# EAGLE board perfusion_esquematico_v1 (EAGLE 9.4.2)
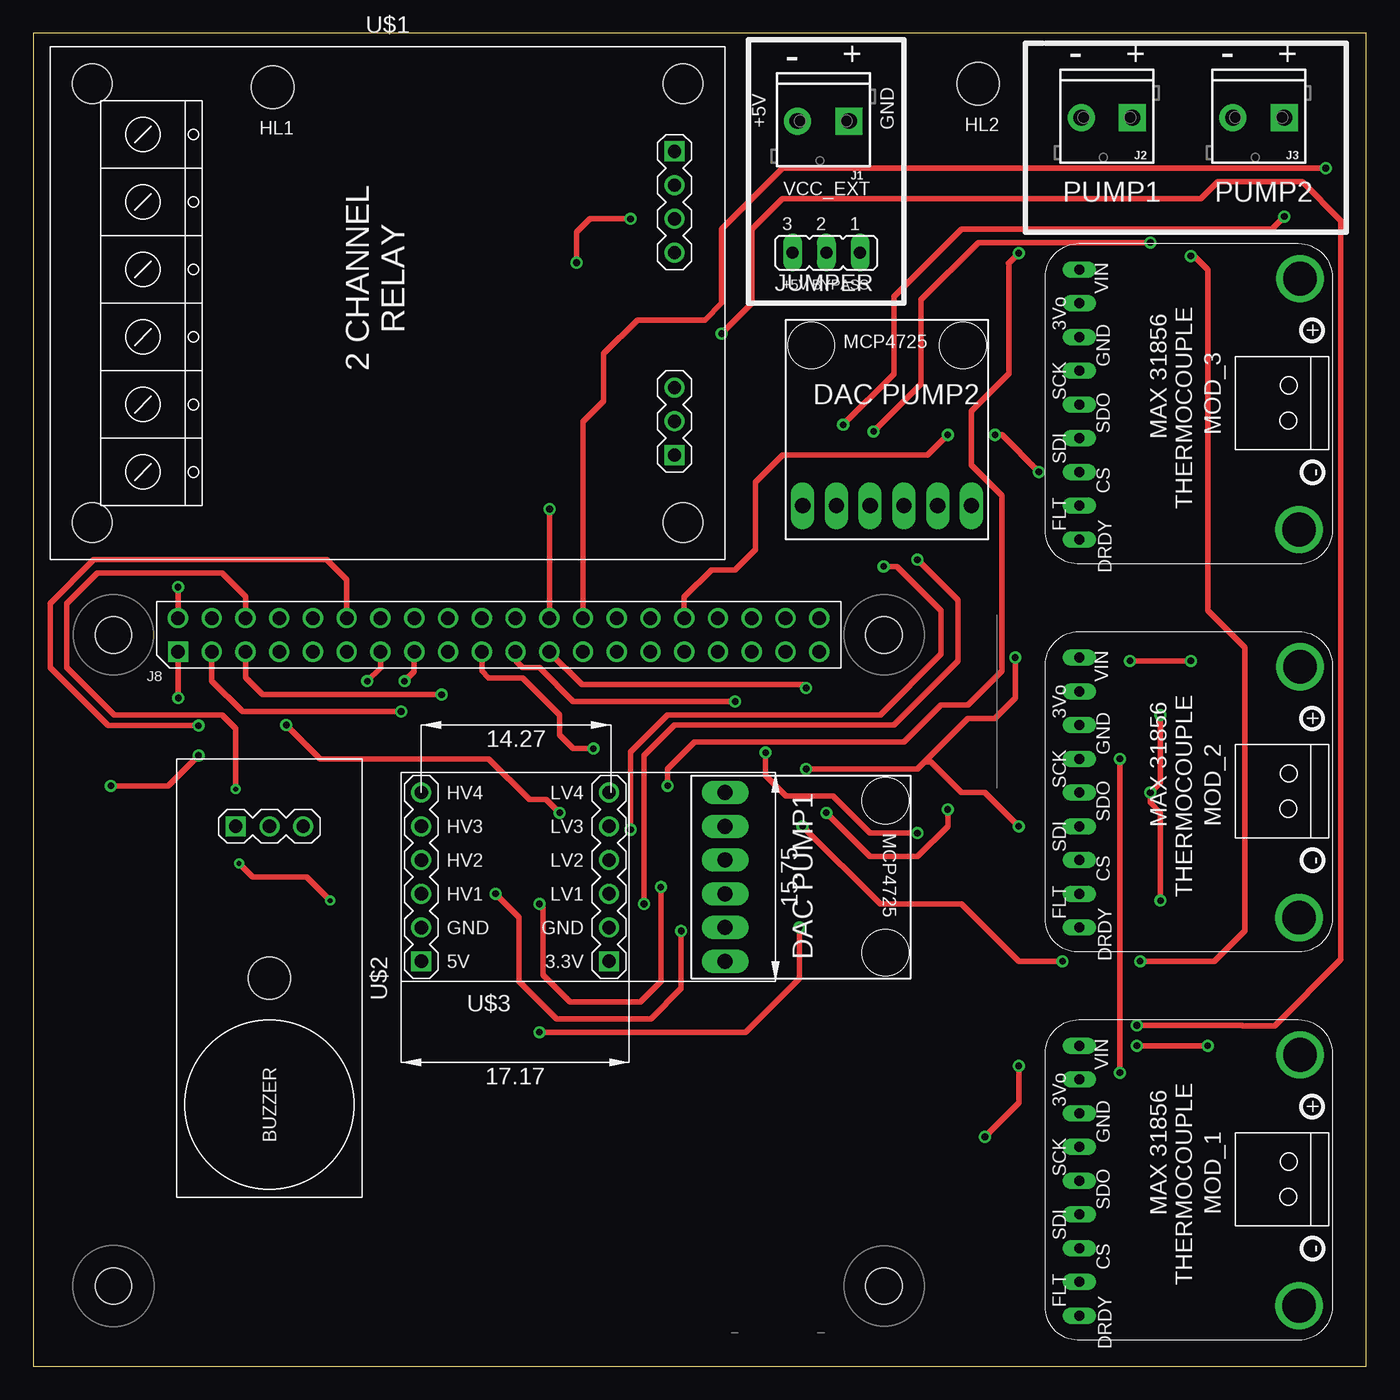
[diagram p0: board, top side]
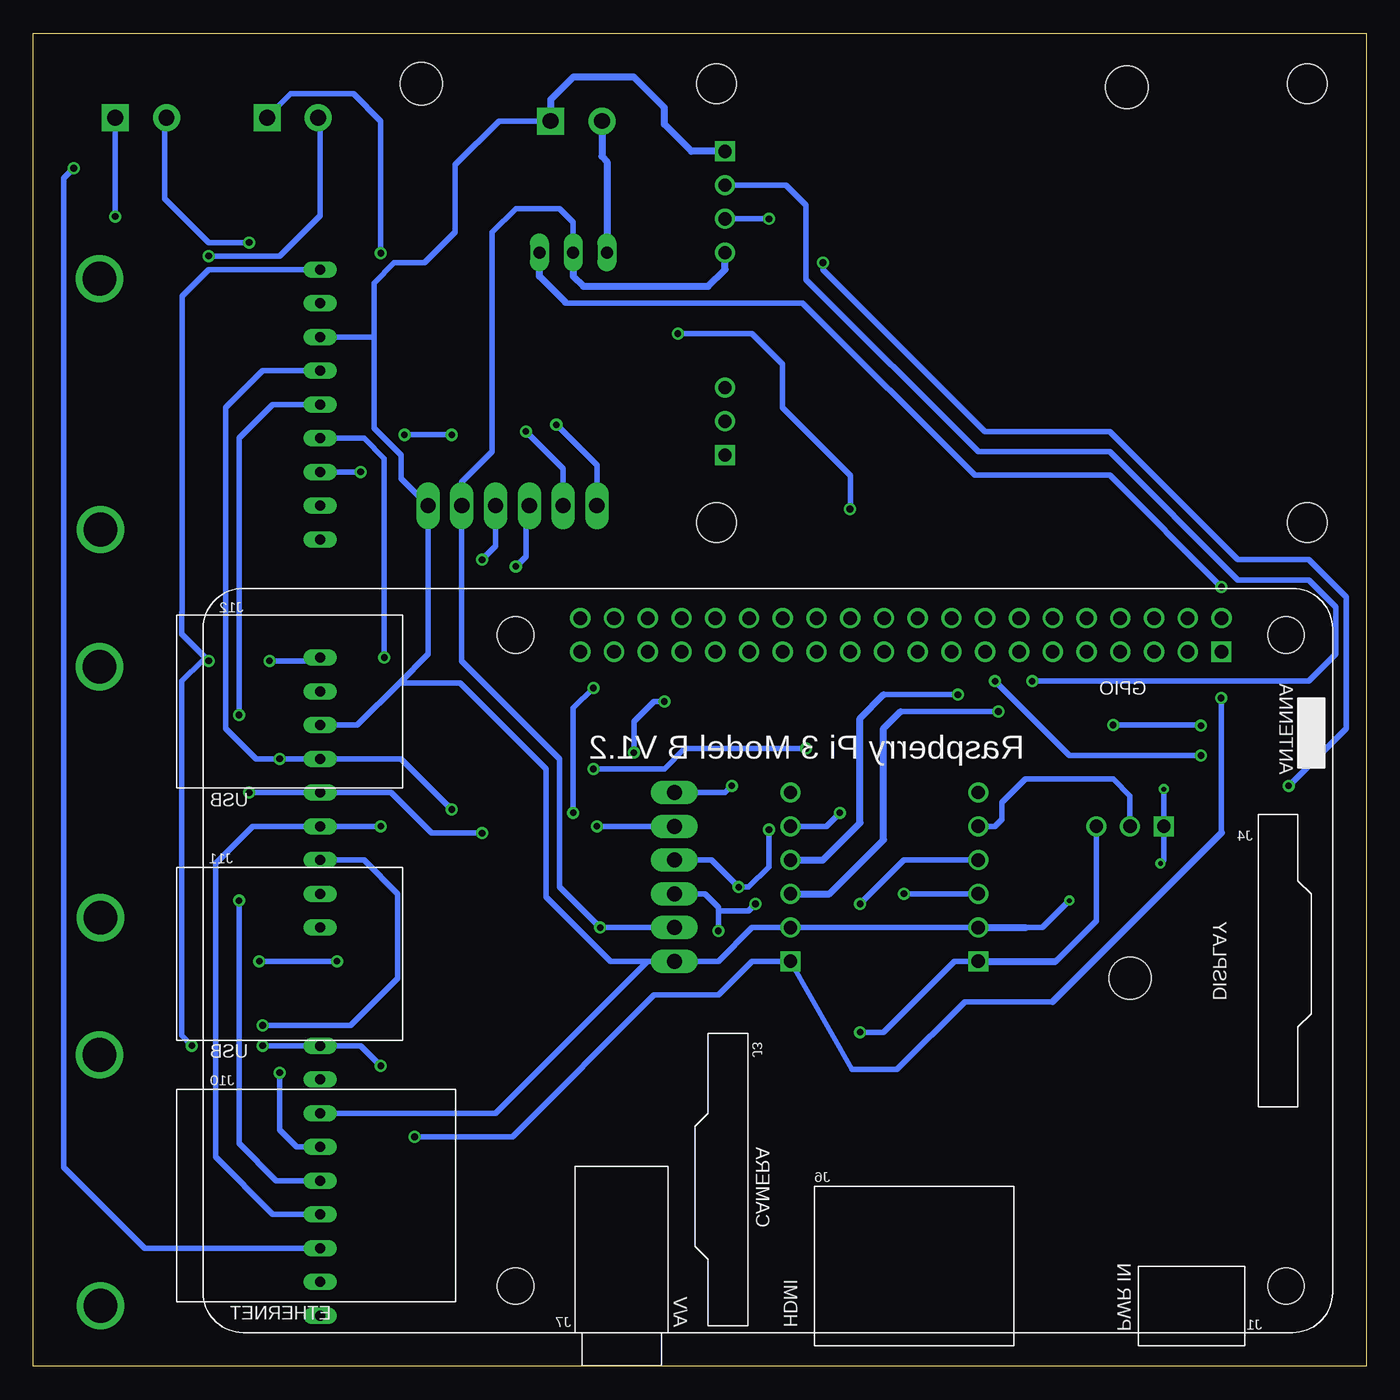
[diagram p1: board, bottom side, seen from below]

Size 100.33 x 100.33 mm. Coordinates in mm from the lower left corner, seen from the top.
Outline: 0,0 100.33,0 100.33,100.33 0,100.33 0,0
Copper layers (1*16): Top 0.035mm / dielectric 1.5mm / Bottom 0.035mm
Design rules "default": minimum track width 6mil, minimum drill 0.35mm, track to track 6mil, track to pad 6mil, pad to pad 6mil, via to via 6mil, smd to smd 6mil, copper to edge 40mil, drill to drill 6mil, minimum pad ring 10mil, minimum via ring 8mil, stop-mask expansion 4mil, vias tented up to drill 0mil, thermal gap 10mil
Holes 3.2 mm at 71.12,96.52 18.03,96.27

## Footprints (pad centres in the part's own frame; a part is rotated, then mirrored left to right if it is on the bottom)
SCREWTERMINAL-3.5MM-2_LOCK = drill 1.2 pad 2.032 square: 1 -0.178,0 | drill 1.2 pad 2.032: 2 3.678,0
JP2 = drill 0.914 long: 1 -2.54,0; 2 0,0; 3 2.54,0
RPI3 = drill 1.016 square: P$1 8.37,51.23 | drill 1.016: P$2 8.357,53.772; P$3 10.897,51.232; P$4 10.897,53.772; P$5 13.437,51.232; P$6 13.437,53.772; P$7 15.977,51.232; P$8 15.977,53.772; P$9 18.517,51.232; P$10 18.517,53.772; P$11 21.057,51.232; P$12 21.057,53.772; P$13 23.597,51.232; P$14 23.597,53.772; P$15 26.137,51.232; P$16 26.137,53.772; P$17 28.677,51.232; P$18 28.677,53.772; P$19 31.217,51.232; P$20 31.217,53.772; P$21 33.757,51.232; P$22 33.757,53.772; P$23 36.297,51.232; P$24 36.297,53.772; P$25 38.837,51.232; P$26 38.837,53.772; P$27 41.377,51.232; P$28 41.377,53.772; P$29 43.917,51.232; P$30 43.917,53.772; P$31 46.457,51.232; P$32 46.457,53.772; P$33 48.997,51.232; P$34 48.997,53.772; P$35 51.537,51.232; P$36 51.537,53.772; P$37 54.077,51.232; P$38 54.077,53.772; P$39 56.617,51.232; P$40 56.617,53.772 | hole 2.75: 3.5,3.5; 61.5,3.5; 3.5,52.5; 61.5,52.5
RELAY-2-SRD = drill 1 square: J1.1 21.59,11.43; J2.1 21.59,-11.43 | drill 1: J1.2 21.59,8.89; J1.3 21.59,6.35; J1.4 21.59,3.81; J2.2 21.59,-8.89; J2.3 21.59,-6.35 | hole 3: -22.225,16.51; 22.225,16.51; 22.225,-16.51; -22.225,-16.51
SOUND-BUZZER = drill 1 square: 1 -11.43,-2.54 | drill 1: 2 -11.43,0; 3 -11.43,2.54 | hole 3.2: 0,0
LEVEL-SHIFTER-4CH = drill 1 square: J1.1 -9.042,6.35; J2.1 5.08,6.35 | drill 1: J1.2 -9.042,3.81; J1.3 -9.042,1.27; J1.4 -9.042,-1.27; J1.5 -9.042,-3.81; J1.6 -9.042,-6.35; J2.2 5.08,3.81; J2.3 5.08,1.27; J2.4 5.08,-1.27; J2.5 5.08,-3.81; J2.6 5.08,-6.35
MAX31856 = drill 0.75 long: PINES1 2.54,2.54; PINES2 5.08,2.54; PINES3 7.62,2.54; PINES4 10.16,2.54; PINES5 12.7,2.54; PINES6 15.24,2.54; PINES7 17.78,2.54; PINES8 20.32,2.54; PINES9 22.86,2.54 | drill 2.54 pad 3.556: PINES10 3.232,19.135; PINES11 22.116,19.077
LIB1 = drill 1.143 pad 1.778 long: GND 1.27,1.27; GND2 1.27,11.43; OUT 1.27,13.97; SCL 1.27,8.89; SDA 1.27,6.35; VCC 1.27,3.81

## Placement (x,y rotation side)
J1  [SCREWTERMINAL-3.5MM-2_LOCK]  61.21,93.73 180 top
J2  [SCREWTERMINAL-3.5MM-2_LOCK]  82.55,93.98 180 top
J3  [SCREWTERMINAL-3.5MM-2_LOCK]  93.98,93.98 180 top
JUMPER  [JP2]  59.69,83.82 180 top
PCB1  RPI3  [RPI3]  2.54,2.54 0 top
U$1  RELAY-2-SRD  [RELAY-2-SRD]  26.67,80.01 0 top
U$2  SOUND-BUZZER  [SOUND-BUZZER]  17.78,29.21 270 top
U$3  LEVEL-SHIFTER-4CH  [LEVEL-SHIFTER-4CH]  34.29,36.83 180 top
U$4  MAX31856  [MAX31856]  76.2,55.88 270 top
U$5  MAX31856  [MAX31856]  76.2,26.67 270 top
U$6  MAX31856  [MAX31856]  76.2,85.09 270 top
U$7  LIB1MCP4725_ABF  [LIB1]  71.88,63.5 90 top
U$8  LIB1MCP4725_ABF  [LIB1]  50.8,29.21 0 top

## Library data of the parts
J1-J3 = SparkFun-Connectors; PROD_ID: CONN-08399
JUMPER = jumper
PCB1 = e14_Rpi3_RevA
U$1-U$3 = diy-modules
U$4-U$6 = max31856_libreria
U$7 U$8 = mcp4725_alberto

## Nets
BUZZER_IN: PCB1.P$12 U$3.J1.5
BUZZER_OUT_5V: U$2.2 U$3.J2.5
GND.2: U$1.J2.3
I2C_SCL: PCB1.P$5 U$3.J1.4
I2C_SCL_5V: U$3.J2.4 U$7.SCL U$8.SCL
I2C_SDA: PCB1.P$3 U$3.J1.3
I2C_SDA_5V: U$3.J2.3 U$7.SDA U$8.SDA
MCP_1_GND: J2.2 U$8.GND2
MCP_1_VSS: J2.1 U$8.OUT
MCP_2_GND: J3.2 U$7.GND2
MCP_2_VSS: J3.1 U$7.OUT
RELAY_IN1: PCB1.P$15 U$1.J1.3
RELAY_IN2: PCB1.P$13 U$1.J1.2
RPI3_+3V: PCB1.P$1 U$3.J1.1 U$4.PINES1 U$5.PINES1 U$6.PINES1
RPI3_+5V: JUMPER.2 U$1.J1.4 U$2.3 U$3.J2.1 U$7.VCC U$8.VCC
RPI3_+5V_IN: JUMPER.1 PCB1.P$2
RPI3_GND: J1.1 PCB1.P$6 U$1.J1.1 U$2.1 U$3.J1.2 U$3.J2.2 U$4.PINES3 U$5.PINES3 U$6.PINES3 U$7.GND U$8.GND
SPI0_CLK: PCB1.P$23 U$4.PINES4 U$5.PINES4 U$6.PINES4
SPI0_CS0: PCB1.P$24 U$4.PINES7
SPI0_CS1: PCB1.P$26 U$5.PINES7
SPI0_MISO: PCB1.P$21 U$4.PINES5 U$5.PINES5 U$6.PINES5
SPI0_MOSI: PCB1.P$19 U$4.PINES6 U$5.PINES6 U$6.PINES6
SUPPLY_+5V: J1.2 JUMPER.3
THERMO_CS3: PCB1.P$32 U$6.PINES7
VCC.2: U$1.J2.2

## Tracks (layer width: path | path; a pad name or v marks a point on that pad's centre or on a via)
BUZZER_IN  (via drill 0.5)
  Top 0.406: v39.62,41.66 38.61,42.67 37.34,42.67 34.29,45.72 21.59,45.72 v19.05,48.26 | v12.45,48.21 5.63,48.21 1.27,52.58 1.27,57.4 4.57,60.71 22.1,60.71 23.6,59.21 PCB1.P$12
  Bottom 0.406: U$3.J1.5 40.64,40.64 v39.62,41.66 | v19.05,48.26 12.45,48.26 v12.45,48.21
BUZZER_OUT_5V
  Bottom 0.406: U$2.2 17.78,42.93 19.05,44.2 25.65,44.2 27.43,42.42 27.43,41.15 27.94,40.64 U$3.J2.5
I2C_SCL  (via drill 0.5)
  Top 0.406: v30.73,50.55 17.27,50.55 15.98,51.84 PCB1.P$5
  Bottom 0.406: 36.32,50.55 v30.73,50.55
  Bottom 0.508: U$3.J1.4 40.89,38.1 38.1,40.89 38.1,48.77 36.32,50.55
I2C_SCL_5V  (via drill 0.5)
  Top 0.406: v38.1,34.8 38.35,34.54 38.35,29.46 40.39,27.43 45.72,27.43 47.24,28.96 v47.24,36.07 | v64.01,60.2 65.02,60.2 68.33,56.9 68.33,53.59 63.75,49.02 47.75,49.02 44.96,46.23 v44.96,40.39
  Bottom 0.406: U$3.J2.4 34.8,38.1 v38.1,34.8 | U$8.SCL 49.28,38.1 v47.24,36.07 46.48,36.07 44.96,37.59 v44.96,40.39 | U$7.SCL 63.25,64.52 63.25,60.96 v64.01,60.2
I2C_SDA  (via drill 0.5)
  Top 0.406: v27.69,49.28 15.75,49.28 13.44,51.59 PCB1.P$3
  Bottom 0.406: 35.05,49.28 v27.69,49.28
  Bottom 0.508: U$3.J1.3 40.39,35.56 36.32,39.62 36.32,48.01 35.05,49.28
I2C_SDA_5V  (via drill 0.5)
  Top 0.406: v34.8,35.56 36.58,33.78 36.58,28.96 39.37,26.16 46.48,26.16 48.77,28.45 v48.77,32.77 | v66.55,60.71 69.6,57.66 69.6,53.09 64.77,48.26 48.26,48.26 45.97,45.97 v45.97,34.8
  Bottom 0.406: v34.8,35.56 U$3.J2.3 | v48.77,32.77 48.77,34.29 | 48.77,34.29 48.77,34.54 49.78,35.56 U$8.SDA | U$7.SDA 65.53,61.72 v66.55,60.71 | v45.97,34.8 46.48,34.29 48.77,34.29
MCP_1_GND  (via drill 0.5)
  Top 0.406: v57.91,40.64 63.75,34.8 69.85,34.8 74.17,30.48 v77.47,30.48 | v83.31,30.48 88.9,30.48 91.19,32.77 91.19,54.1 88.39,56.9 88.39,82.55 87.38,83.57 v87.12,83.57
  Bottom 0.406: U$8.GND2 v57.91,40.64 | v77.47,30.48 v83.31,30.48 | v87.12,83.57 81.79,83.57 78.74,86.61 78.74,93.85 J2.2
MCP_1_VSS  (via drill 0.5)
  Top 0.406: v74.17,83.77 73.43,83.03 | 73.43,83.03 73.41,83.01 | v47.75,43.69 47.75,44.96 49.78,46.99 65.53,46.99 68.33,49.78 70.36,49.78 72.9,52.32 72.9,65.53 70.61,67.82 70.61,71.88 73.43,74.7 73.43,83.03
  Bottom 0.406: J2.1 80.95,95.76 76.2,95.76 74.17,93.73 v74.17,83.77 | v47.75,43.69 48.26,43.18 U$8.OUT
MCP_2_GND  (via drill 0.5)
  Top 0.406: v63.25,70.36 66.8,73.91 66.8,80.26 71.12,84.58 v84.07,84.58
  Bottom 0.406: U$7.GND2 60.45,67.56 v63.25,70.36 | v84.07,84.58 87.12,84.58 90.42,87.88 90.42,93.86 J3.2
MCP_2_VSS  (via drill 0.5)
  Top 0.406: v60.96,70.87 64.77,74.68 64.77,80.52 69.85,85.6 93.22,85.6 v94.16,86.54
  Bottom 0.406: U$7.OUT 57.91,67.82 v60.96,70.87 | v94.16,86.54 J3.1
RELAY_IN1  (via drill 0.5)
  Top 0.406: PCB1.P$15 28.68,52.3 v27.94,51.56 | v12.45,45.97 10.16,43.69 v5.84,43.69 | v40.89,83.06 40.89,85.34 41.91,86.36 v44.96,86.36
  Bottom 0.406: v27.94,51.56 22.35,45.97 v12.45,45.97 | v5.84,43.69 1.52,48.01 1.52,57.91 4.32,60.71 9.65,60.71 19.3,70.36 28.7,70.36 40.89,82.55 v40.89,83.06 | v44.96,86.36 U$1.J1.3
RELAY_IN2  (via drill 0.5)
  Top 0.406: PCB1.P$13 26.14,52.55 v25.15,51.56
  Bottom 0.406: v25.15,51.56 4.32,51.56 2.29,53.59 2.29,57.15 4.32,59.18 9.65,59.18 19.3,68.83 29.21,68.83 42.16,81.79 42.16,87.38 43.69,88.9 U$1.J1.2
RPI3_+3V  (via drill 0.5)
  Top 0.406: v71.63,17.27 74.17,19.81 v74.17,22.61 | v83.06,24.13 v88.39,24.13 | v87.12,53.09 v82.55,53.09 | v10.92,50.29 10.92,53.76 PCB1.P$1
  Bottom 0.406: v71.63,17.27 64.26,17.27 53.59,27.94 48.77,27.94 46.23,30.48 U$3.J1.1 38.7,22.35 35.31,22.35 30.23,27.43 23.62,27.43 | v74.17,22.61 75.69,24.13 U$5.PINES1 v83.06,24.13 | v88.39,24.13 89.15,24.89 89.15,51.56 87.63,53.09 v87.12,53.09 89.15,55.12 89.15,56.72 89.13,56.74 89.13,80.54 87.12,82.55 U$6.PINES1 | v82.55,53.09 78.99,53.09 U$4.PINES1 | 10.91,40.14 v10.91,50.28 v10.92,50.29
  Bottom 0.508: 23.62,27.43 10.91,40.14
RPI3_+5V  (via drill 0.5)
  Top 0.406: v38.1,25.15 53.59,25.15 57.66,29.21 v57.66,33.02
  Bottom 0.406: U$3.J2.1 30.99,30.48 36.32,25.15 v38.1,25.15 | U$8.VCC v57.66,33.02 60.71,36.07 60.71,45.72 68.07,53.09 U$7.VCC | JUMPER.2 59.69,86.11 60.71,87.12 64.01,87.12 65.79,85.34 65.79,68.83 68.07,66.55 U$7.VCC | U$7.VCC 68.07,65.79 67.82,66.04 | 23.37,30.48 20.32,33.53 U$2.3
  Bottom 0.508: U$3.J2.1 23.37,30.48 | JUMPER.2 59.69,82.04 58.93,81.28 49.53,81.28 48.26,82.55 U$1.J1.4
RPI3_+5V_IN  (via drill 0.5)
  Top 0.406: v10.9,58.65 PCB1.P$2
  Bottom 0.406: 60.96,80.77 60.2,80.01 42.42,80.01 29.46,67.06 19.3,67.06 v10.9,58.65
  Bottom 0.508: 60.27,80.09 60.96,80.77 62.23,82.04 JUMPER.1
RPI3_GND  (via drill 0.35)
  Top 0.406: PCB1.P$6 15.98,57.94 14.22,59.69 4.83,59.69 2.54,57.4 2.54,52.58 6.1,49.02 14.22,49.02 15.24,48.01 v15.24,43.43 | v22.35,35.05 20.57,36.83 16.51,36.83 v15.49,37.85
  Bottom 0.406: 54.1,30.48 U$8.GND 48.77,30.48 46.23,33.02 U$3.J1.2 U$3.J2.2 | U$5.PINES3 65.53,19.05 54.1,30.48 | U$4.PINES3 75.95,48.26 72.77,51.44 | 72.77,51.44 70.61,53.59 U$7.GND | U$7.GND 70.61,66.29 | 74.68,77.47 U$6.PINES3 | J1.1 65.28,93.73 68.58,90.42 68.58,85.34 70.87,83.06 73.15,83.06 74.68,81.53 74.68,77.47 | 54.1,30.48 56.9,30.48 61.72,35.31 61.72,44.96 68.2,51.44 72.77,51.44 | U$7.GND 72.64,66.8 72.64,68.58 74.68,70.61 74.68,77.47 | 25.65,33.02 24.38,33.02 v22.35,35.05 | v15.49,37.85 15.24,38.1 U$2.1 v15.24,43.43
  Bottom 0.508: U$3.J2.2 25.65,33.02 | U$1.J1.1 50.8,91.44 52.83,93.47 52.83,94.74 55.12,97.03 59.69,97.03 61.39,95.33 J1.1
SPI0_CLK  (via drill 0.5)
  Top 0.406: v81.79,22.1 v81.79,45.72 | PCB1.P$23 41.3,51.31 57.91,51.31 v58.17,51.05 | v59.69,41.66 62.99,38.35 66.55,38.35 68.83,40.64 v68.83,41.91
  Bottom 0.406: U$6.PINES4 83.06,74.93 85.85,72.14 85.85,48.01 83.57,45.72 v81.79,45.72 U$4.PINES4 72.64,45.72 v68.83,41.91 | U$5.PINES4 80.52,16.51 81.79,17.78 v81.79,22.1 | v58.17,51.05 59.69,49.53 v59.69,41.66
SPI0_CS0  (via drill 0.5)
  Top 0.406: v51.82,77.72 54.1,80.01 54.1,85.6 56.39,87.88 87.88,87.88 89.15,89.15 95.5,89.15 98.42,86.23 | 98.42,86.23 98.55,86.11 | 98.42,86.23 98.42,30.61 93.45,25.63 91.03,25.63 91.01,25.65 v83.06,25.65 | v38.86,64.52 38.86,56.34 PCB1.P$24
  Bottom 0.406: v51.82,77.72 46.23,77.72 43.94,75.44 43.94,72.14 38.84,67.03 38.84,64.54 v38.86,64.52 | v83.06,25.65 76.45,25.65 72.9,29.21 72.9,35.56 75.44,38.1 U$4.PINES7
SPI0_CS1  (via drill 0.5)
  Top 0.406: v97.28,90.17 56.39,90.17 51.82,85.6 51.82,80.01 50.55,78.74 45.47,78.74 42.93,76.2 42.93,72.64 41.38,71.09 PCB1.P$26
  Bottom 0.406: U$5.PINES7 91.95,8.89 98.04,14.99 98.04,89.41 v97.28,90.17
SPI0_MISO  (via drill 0.5)
  Top 0.406: v84.84,35.05 84.84,41.66 84.07,42.42 v84.07,43.18 84.84,43.94 v84.84,49.02 | PCB1.P$21 36.32,53.75 36.32,53.09 36.83,52.58 38.1,52.58 40.64,50.04 v52.83,50.04 | v55.12,46.18 55.12,44.45 56.64,42.93 60.2,42.93 62.99,40.13 v66.55,40.13
  Bottom 0.406: U$5.PINES5 82.04,13.97 84.84,16.76 v84.84,35.05 | v84.07,43.18 U$4.PINES5 73.41,43.18 70.36,40.13 v66.55,40.13 | U$6.PINES5 82.3,72.39 84.84,69.85 v84.84,49.02 | v52.83,50.04 53.59,50.04 55.12,48.51 v55.12,46.18
SPI0_MOSI  (via drill 0.5)
  Top 0.406: v58.17,44.96 66.55,44.96 67.06,45.47 | 67.06,45.47 67.56,45.47 69.85,43.18 71.63,43.18 v74.17,40.64 | 73.91,53.09 v73.91,53.34 73.91,50.29 72.39,48.77 70.36,48.77 67.06,45.47 | PCB1.P$19 33.78,53.75 33.78,52.32 34.29,51.82 36.83,51.82 39.62,49.02 39.62,47.5 40.64,46.48 v42.16,46.48
  Bottom 0.406: U$5.PINES6 82.3,11.43 86.61,15.75 86.61,37.85 83.82,40.64 U$4.PINES6 v74.17,40.64 | U$6.PINES6 75.44,69.85 73.91,68.33 v73.91,53.34 | v42.16,46.48 51.31,46.48 52.83,44.96 v58.17,44.96
SUPPLY_+5V
  Bottom 0.508: J1.2 57.54,91.06 57.15,90.68 JUMPER.3
THERMO_CS3  (via drill 0.5)
  Top 0.406: v72.39,70.1 72.9,70.1 v75.69,67.31 | v68.83,70.1 67.31,68.58 56.39,68.58 54.36,66.55 54.36,61.47 52.83,59.94 51.05,59.94 49,57.89 PCB1.P$32
  Bottom 0.406: v68.83,70.1 v72.39,70.1 | v75.69,67.31 U$6.PINES7

## Text on the board
tPlace: - | - | - | + | + | + | GND | HL1 | +5V | HL2 | VCC_EXT | PUMP1 | PUMP2 | +5V BYPASS | 2 CHANNEL / RELAY | DAC PUMP2 | MOD_3 | DAC PUMP1 | MOD_2 | MOD_1
tDocu: PERFUSION V1.0 / alejandrolucas@us.es / +34 619939928 / Dpto. FISICA APLICADA III